# EAGLE board Crystal Filter (EAGLE 9.1.2)
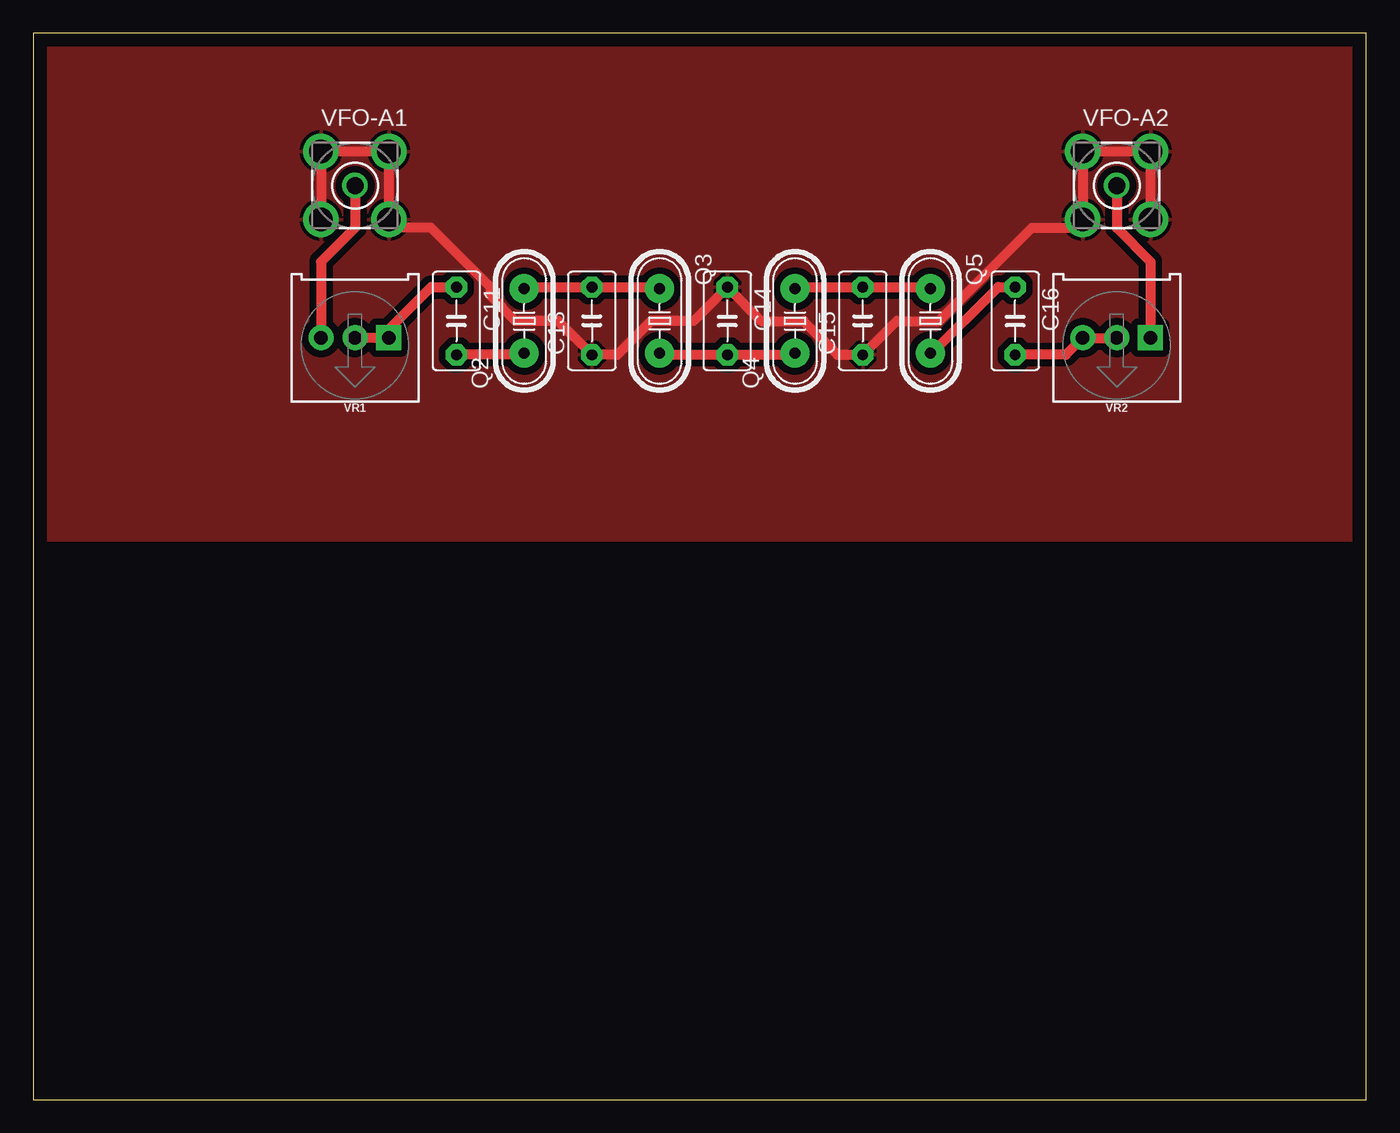
[diagram p0: board, top side]

Size 100 x 80 mm. Coordinates in mm from the lower left corner, seen from the top.
Outline: 0,0 100,0 100,80 0,80 0,0
Copper layers (1*16): Top 0.035mm / dielectric 1.5mm / Bottom 0.035mm
Design rules "default": minimum track width 6mil, minimum drill 0.35mm, track to track 6mil, track to pad 6mil, pad to pad 6mil, via to via 6mil, smd to smd 6mil, copper to edge 40mil, drill to drill 6mil, minimum pad ring 10mil, minimum via ring 8mil, stop-mask expansion 4mil, vias tented up to drill 0mil, thermal gap 10mil
Net classes: 0 default: width 0.762 mm, drill 0.762 mm, clearance 0.508 mm

## Footprints (pad centres in the part's own frame; a part is rotated, then mirrored left to right if it is on the bottom)
C5B3.5 = drill 0.813 pad 1.6 octagon: 1 -2.54,0; 2 2.54,0
HC49/S = drill 0.813 pad 2.184: 1 -2.413,0; 2 2.413,0
BU-SMA-V = drill 1.27: 1 0,0 | drill 1.778: 2 -2.55,2.55; 3 2.55,2.55; 4 2.55,-2.55; 5 -2.55,-2.55
TRIMPOT-PTH-3386U = drill 1.016 pad 1.88 square: 1 -2.54,-0.015 | drill 1.016 pad 1.88: 2 0,-0.015; 3 2.54,-0.015

## Placement (x,y rotation side)
C11  270pF  [C5B3.5]  31.75,58.42 270 top
C13  270pF  [C5B3.5]  41.91,58.42 90 top
C14  270pF  [C5B3.5]  52.07,58.42 270 top
C15  270pF  [C5B3.5]  62.23,58.42 90 top
C16  270pF  [C5B3.5]  73.66,58.42 270 top
Q2  [HC49/S]  36.83,58.42 90 top
Q3  [HC49/S]  46.99,58.42 270 top
Q4  [HC49/S]  57.15,58.42 90 top
Q5  [HC49/S]  67.31,58.42 270 top
VFO-A1  BU-SMA-V  [BU-SMA-V]  24.13,68.58 0 top
VFO-A2  BU-SMA-V  [BU-SMA-V]  81.28,68.58 0 top
VR1  500  [TRIMPOT-PTH-3386U]  24.13,57.15 180 top
VR2  500  [TRIMPOT-PTH-3386U]  81.28,57.15 180 top

## Library data of the parts
C11 C13-C16 = capacitor-wima
Q2-Q5 = crystal
VFO-A1 VFO-A2 = con-coax; OC_FARNELL: unknown; OC_NEWARK: unknown
VR1 VR2 = SparkFun-Resistors; PROD_ID: RES-09730; SF_SKU: COM-09806

## Nets
GND: C13.1 C14.1 C15.1 VFO-A1.2 VFO-A1.3 VFO-A1.4 VFO-A1.5 VFO-A2.2 VFO-A2.3 VFO-A2.4 VFO-A2.5
N$1: C11.1 VR1.1 VR1.2
N$2: C16.2 VR2.2 VR2.3
N$3: VFO-A2.1 VR2.1
N$4: VFO-A1.1 VR1.3
N$12: C16.1 Q5.2
N$16: C11.2 Q2.1
N$17: C13.2 Q2.2 Q3.1
N$18: C14.2 Q3.2 Q4.1
N$19: C15.2 Q4.2 Q5.1

## Tracks (layer width: path | path; a pad name or v marks a point on that pad's centre or on a via)
GND
  Top 0.762: VFO-A2.2 VFO-A2.5 78.11,65.41 74.93,65.41 67.94,58.42 64.77,58.42 C15.1 60.33,55.88 57.78,58.42 54.61,58.42 C14.1 49.53,58.42 46.35,58.42 43.81,55.88 C13.1 39.37,58.42 36.2,58.42 34.29,60.33 34.29,60.96 29.84,65.41 27.3,65.41 VFO-A1.4 VFO-A1.3 | VFO-A2.2 | VFO-A2.3 VFO-A2.4 | VFO-A2.3 | VFO-A2.3 VFO-A2.2 | VFO-A1.2 VFO-A1.5 | VFO-A1.2 | VFO-A1.3 | VFO-A1.3 VFO-A1.2
  pour Top: 0,80.01 100.33,80.01 100.33,41.91 0,41.91
N$1
  Top 0.762: C11.1 29.84,60.96 26.67,57.78 VR1.1 VR1.2
N$2
  Top 0.762: C16.2 77.47,55.88 VR2.3 | VR2.3 | VR2.3 VR2.2
N$3
  Top 0.762: VFO-A2.1 81.28,65.41 83.82,62.87 83.82,57.78 VR2.1
N$4
  Top 0.762: VFO-A1.1 24.13,65.41 21.59,62.87 21.59,57.78 VR1.3
N$12
  Top 0.762: C16.1 72.39,60.96 67.31,55.88 Q5.2
N$16
  Top 0.762: C11.2 36.83,55.88 Q2.1
N$17
  Top 0.762: Q2.2 36.83,60.96 C13.2 46.99,60.96 Q3.1
N$18
  Top 0.762: Q3.2 46.99,55.88 C14.2 57.15,55.88 Q4.1
N$19
  Top 0.762: Q4.2 57.15,60.96 C15.2 67.31,60.96 Q5.1